# Altium PCB IO_Driver1616.PcbDoc
Units mil, origin at the board's own origin, x right, y up, seen from the top; angles counter-clockwise.
Board outline 7838.58 x 6988.19 mil, 2 copper layers (Top Layer, Bottom Layer); 104 components, 121 nets, 366 pads, 36 vias.
Unrouted connection lines stored in the file: 8.
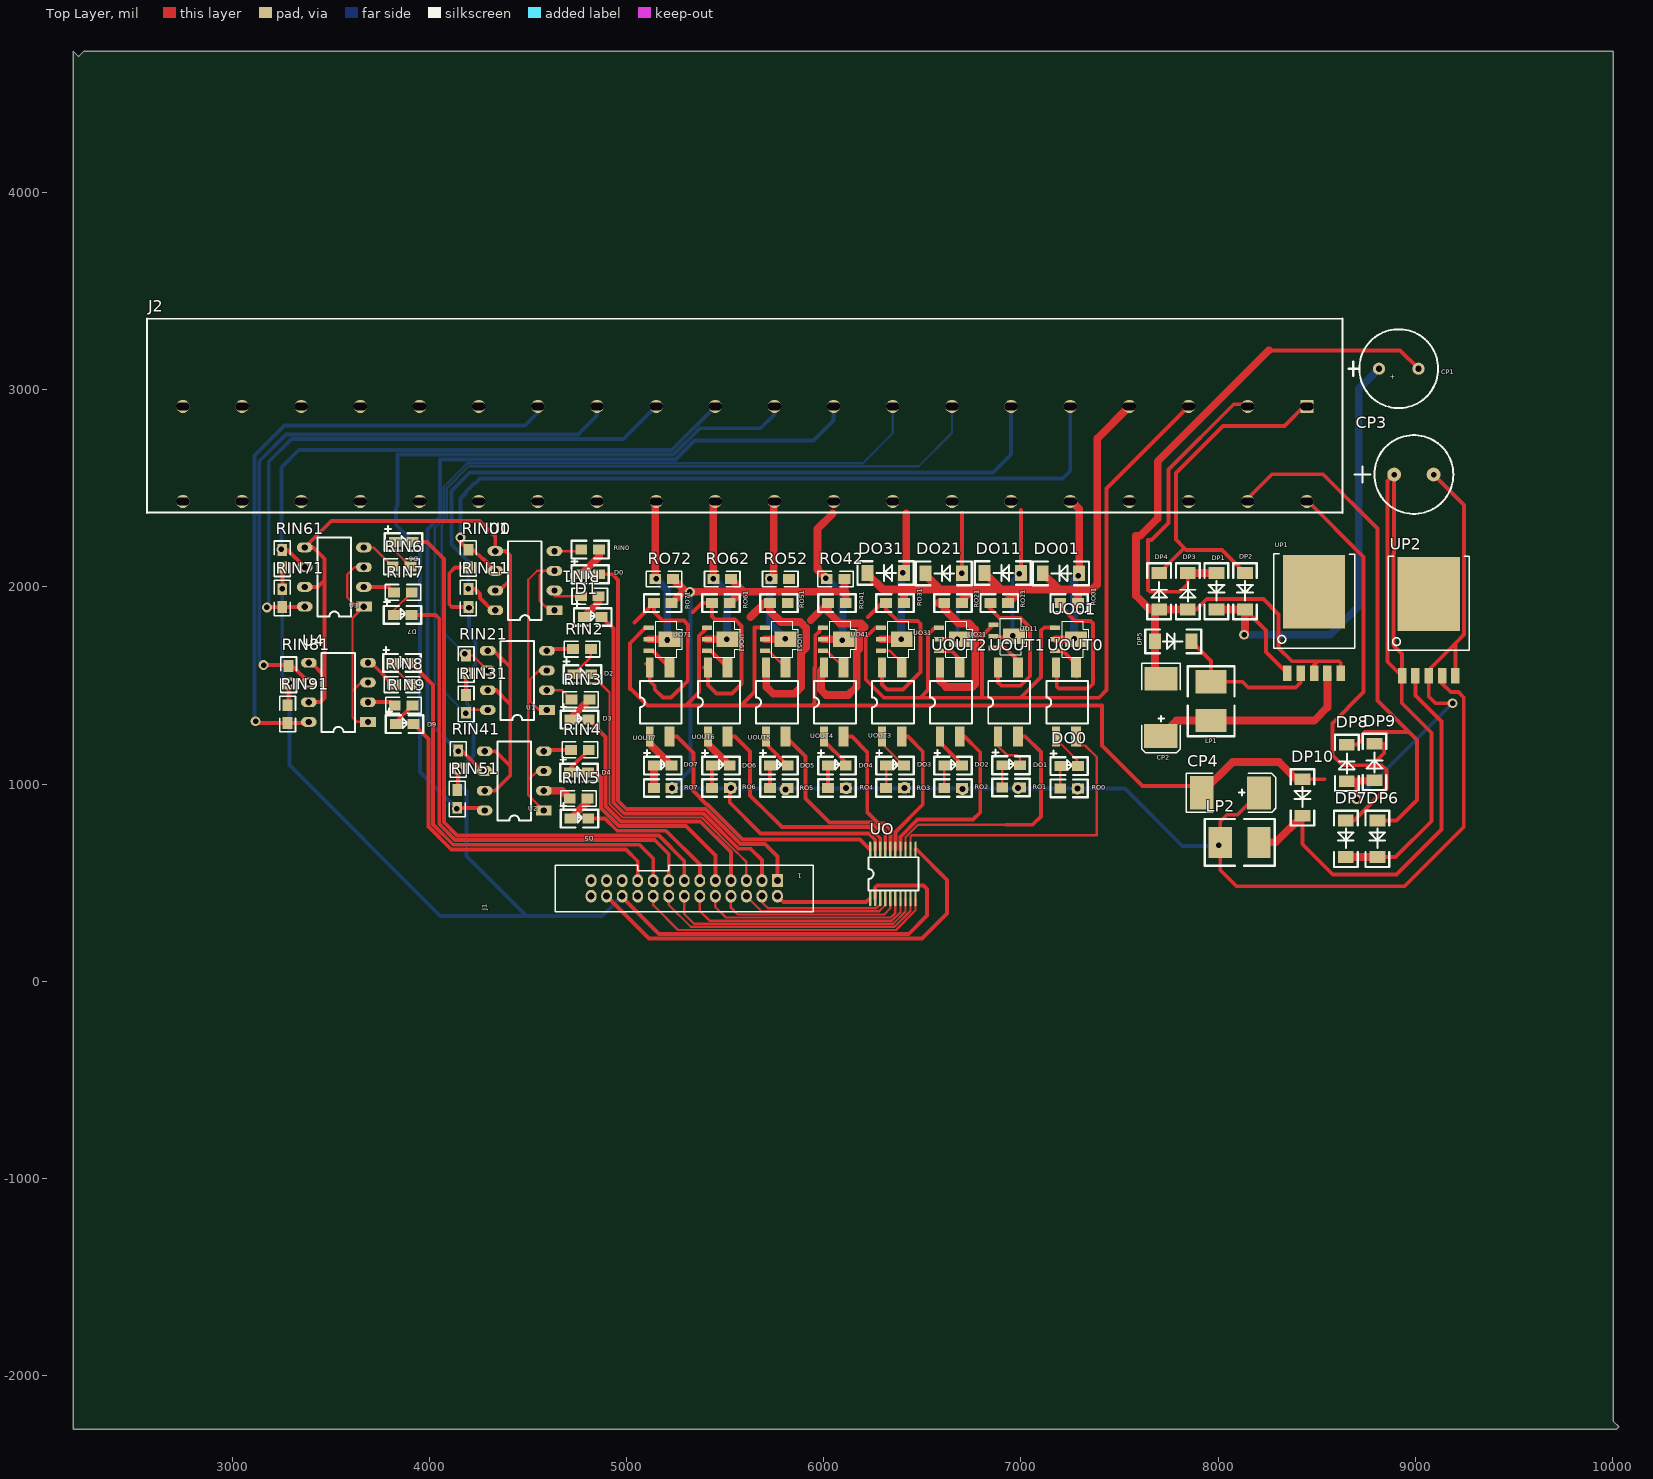
[diagram p0: Top Layer view]
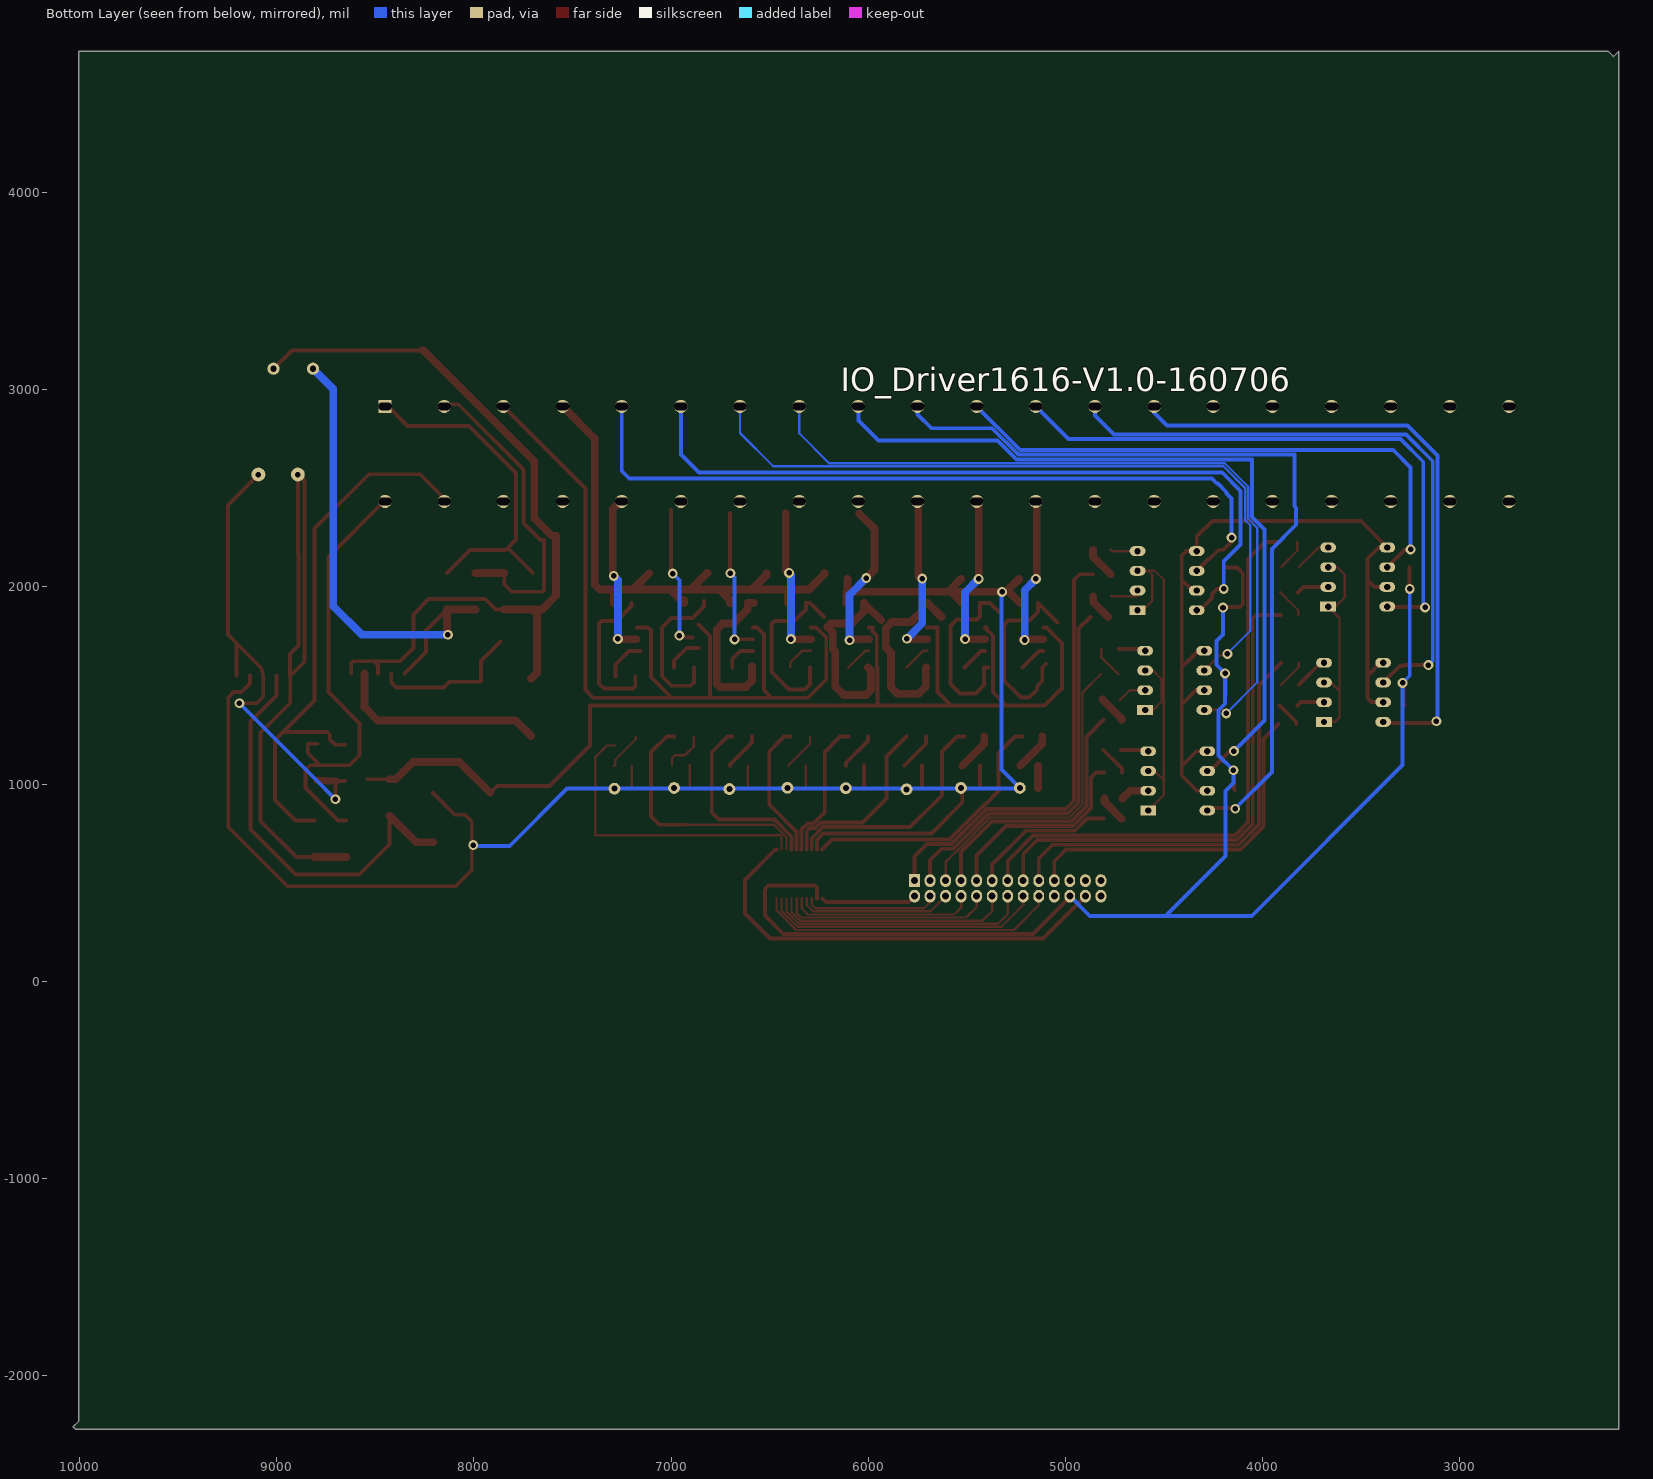
[diagram p1: Bottom Layer view, seen from below]

## Layer stack, top to bottom
Top Layer: signal copper 1.4
Dielectric: dielectric 12.6, FR-4, Dk 4.8
Bottom Layer: signal copper 1.4

## Board outline
2193.31,4716.54 2193.31,-2271.65 10020.08,-2271.65 10031.89,-2259.84 10004.33,-2232.28 10004.33,4716.54 2248.43,4716.54 2220.87,4688.98

## Design rules (kind name [scope] priority, off if disabled: settings)
Clearance [All] p1: gap=3.94
ComponentClearance [All] p1 off: gap=10 collisioncheckmode=3 verticalgap=10 showdistances=FALSE
HoleSize [All] p1: absolutevalues=TRUE maxlimit=393.7 minlimit=1 maxpercent=80.000 minpercent=20.000
HoleToHoleClearance [All] p1: gap=0 allowstackedmicrovias=TRUE
MinimumSolderMaskSliver [All] p1: minsoldermaskwidth=0
PlaneConnect [All] p1: planeconnectstyle=Relief reliefexpansion=11.81 reliefentries=4 reliefconductorwidth=15.75 reliefairgap=10
PolygonConnect [All] p1: connectstyle=Relief reliefconductorwidth=10 reliefentries=4 polygonreliefangle="90 Angle"
RoutingVias [All] p1: holewidth=28 width=50 viastyle="Through Hole" minholewidth=11.81 minwidth=23.62 maxholewidth=31.5 maxwidth=78.74
SilkToSilkClearance [All] p1: silktosilkclearance=0
SilkscreenOverComponentPads [All] p1: minsilkscreentomaskgap=0
SolderMaskExpansion [All] p1: expansion=4
TestPointUsage [All] p1: valid=0 allowmultiple=FALSE
Testpoint [All] p1: side=15 testpointundercomponent=TRUE minsize=40 maxsize=100 preferedsize=60 minholesize=0 maxholesize=40 preferedholesize=32 testpointgrid=1 style=1023 order=0123456789
Width [All] p1: maxlimit=39.37 minlimit=11.81 preferedwidth=19.68
17 further rules are at their usual default settings.

## Components (designator, comment, footprint, x,y, rotation, side; value= is the part's Value field where it differs from the comment)
CP1 "470u/50V" RB.2/.4#1 8815.51,3106.22 r180 top
CP2 "100u/25V" 7343 7709.41,1243.5 r270 top
CP3 "470u/50V" RB.2/.4#2 8992.24,2569.41 r180 top
CP4 "100u/25V" 7343 8207.24,954.41 r0 top
D0 "LED" LED-1 4770.39,2063.5 r0 top
D1 "LED" LED-1 4783.27,1847.24 r0 top
D2 "LED" LED-1 4731.02,1556.38 r0 top
D3 "LED" LED-1 4716.02,1326.38 r0 top
D4 "LED" LED-1 4713.5,1057.99 r0 top
D5 "LED" LED-1 4715.94,824.25 r0 top
D6 "LED" LED-1 3824.09,2227.52 r0 top
D7 "LED" LED-1 3819.09,1857.52 r0 top
D8 "LED" LED-1 3815.91,1614.21 r0 top
D9 "LED" LED-1 3829.33,1303.7 r0 top
DO0 "LED" LED-1 7199.39,1090.71 r0 top
DO01 "1N4007" sma 7295,2068.66 r180 top
DO1 "LED" LED-1 6904.98,1095.43 r0 top
DO2 "LED" LED-1 6610.57,1093.07 r0 top
DO3 "LED" LED-1 6316.16,1093.07 r0 top
DO4 "LED" LED-1 6021.75,1093.07 r0 top
DO5 "LED" LED-1 5727.35,1093.07 r0 top
DO6 "LED" LED-1 5432.93,1093.07 r0 top
DO7 "LED" LED-1 5138.52,1093.07 r0 top
DO11 "1N4007" sma 7000,2070 r180 top
DO21 "1N4007" sma 6700.58,2068.66 r180 top
DO31 "1N4007" sma 6406.16,2070 r180 top
DP1 "DIODE" 4007 7990.87,2070.12 r270 top
DP2 "DIODE" 4007 8135.87,2070.12 r270 top
DP3 "DIODE" 4007 7845.87,1885.12 r90 top
DP4 "DIODE" 4007 7700.87,1885.12 r90 top
DP5 "1N5819" sma 7679.41,1723.5 r0 top
DP6 "DIODE" 4007 8807.24,814.41 r270 top
DP7 "DIODE" 4007 8647.24,814.41 r270 top
DP8 "DIODE" 4007 8652.24,1014.41 r90 top
DP9 "DIODE" 4007 8792.24,1019.41 r90 top
DP10 "1N5819" sma 8427.24,1024.41 r270 top
J1 "HEADER 13X2" "IDC26 -2.0" 5765,510 r180 top
J2 "CON40" KF7.62-40p 2800,3880 r180 top
LP1 "33uH" L-5×5 7964.41,1518.5 r270 top
LP2 "33uH" L-5*5 8207.24,704.41 r180 top
RIN0 "3K" 0805 4770.39,2188.5 r0 top
RIN1 "3K" 0805 4768.27,1952.24 r0 top
RIN01 "3K" 0805 4197.4,2098.15 r90 top
RIN2 "3K" 0805 4728.94,1683.94 r0 top
RIN3 "3K" 0805 4721.26,1428.03 r0 top
RIN4 "3K" 0805 4718.03,1173.31 r0 top
RIN5 "3K" 0805 4711.38,926.5 r0 top
RIN6 "3K" 0805 3814.09,2102.52 r0 top
RIN7 "3K" 0805 3820.32,1971.93 r0 top
RIN8 "3K" 0805 3815.91,1504.21 r0 top
RIN9 "3K" 0805 3823.86,1399.02 r0 top
RIN11 "3K" 0805 4197.4,1898.15 r90 top
RIN21 "3K" 0805 4186.02,1561.38 r90 top
RIN31 "3K" 0805 4186.02,1451.38 r270 top
RIN41 "3K" 0805 4145.94,1079.25 r90 top
RIN51 "3K" 0805 4140.94,969.25 r270 top
RIN61 "3K" 0805 3254.09,2097.52 r90 top
RIN71 "3K" 0805 3254.09,1987.52 r270 top
RIN81 "3K" 0805 3285.91,1509.21 r90 top
RIN91 "3K" 0805 3280.91,1399.21 r270 top
RO0 "3K" 0805 7289.39,977.64 r180 top
RO1 "300Ω" 0805 6994.98,982.36 r180 top
RO01 "3K" 0805 7289.39,1917.32 r180 top
RO2 "300Ω" 0805 6700.57,980 r180 top
RO3 "300Ω" 0805 6406.16,980 r180 top
RO4 "300Ω" 0805 6111.75,980 r180 top
RO5 "300Ω" 0805 5817.35,980 r180 top
RO6 "300Ω" 0805 5522.93,980 r180 top
RO7 "300Ω" 0805 5228.52,980 r180 top
RO11 "3K" 0805 6934.62,1917.32 r180 top
RO21 "3K" 0805 6700.58,1917.32 r180 top
RO31 "3K" 0805 6406.16,1917.32 r180 top
RO41 "3K" 0805 6111.75,1917.32 r180 top
RO42 "3K" 0805 6105,2040 r180 top
RO51 "3K" 0805 5817.35,1917.32 r180 top
RO52 "3K" 0805 5824.35,2040 r180 top
RO61 "3K" 0805 5522.93,1917.32 r180 top
RO62 "3K" 0805 5529.93,2040 r180 top
RO71 "3K" 0805 5228.52,1917.32 r180 top
RO72 "3K" 0805 5235.52,2040 r180 top
U0 "TLP250" DIP8 4634.21,1881.1 r180 top
U1 "TLP250" DIP8 4595.75,1375.83 r180 top
U2 "TLP250" DIP8 4580.35,866.02 r180 top
U3 "TLP250" DIP8 3667.72,1899.53 r180 top
U4 "TLP250" DIP8 3688.54,1314.96 r180 top
UO "TXS0108E" TXS0108E 6235,420 r90 top
UO01 "BCX56" SOP-89 7173.39,1675.08 r270 top
UO11 "BCX56" SOP-89 6860,1690 r270 top
UO21 "BCX56" SOP-89 6584.58,1675.08 r270 top
UO31 "BCX56" SOP-89 6290.16,1675.08 r270 top
UO41 "BCX56" SOP-89 5995.75,1675.08 r270 top
UO51 "BCX56" SOP-89 5701.35,1675.08 r270 top
UO61 "BCX56" SOP-89 5406.93,1675.08 r270 top
UO71 "BCX56" SOP-89 5112.53,1675.08 r270 top
UOUT0 "OPTOISO1" SO4 7178.42,1240.67 r180 top
UOUT1 "OPTOISO1" SO4 6884.01,1240.67 r180 top
UOUT2 "OPTOISO1" SO4 6589.61,1240.67 r180 top
UOUT3 "OPTOISO1" SO4 6295.2,1240.67 r180 top
UOUT4 "OPTOISO1" SO4 6000.79,1240.67 r180 top
UOUT5 "OPTOISO1" SO4 5706.38,1240.67 r180 top
UOUT6 "OPTOISO1" SO4 5411.97,1240.67 r180 top
UOUT7 "OPTOISO1" SO4 5117.56,1240.67 r180 top
UP1 "LM2596-5" HRP5 8350.67,1561.06 r0 top
UP2 "LM2596-5" HRP5 8932.24,1549.41 r0 top

## Footprints (in the part's own frame and the unit in brackets; to place one, negate y for a bottom-side part, rotate by r counter-clockwise, add the part's x,y. Pads: shape width x height; smd on the part's side, far side on the other; paste and mask are expansions set on the pad)
0805 [mil]
  rect 60x50 smd: 1(0,0) 2(90,0)
  silkscreen extent -50,-45 140,45
4007 [mil]
  rect 60x80 smd: 1(0,0) 2(185,0)
  silkscreen extent -50,-60 235,60
7343 [mil]
  rect 120x169.29 smd: 1(0,0) 2(-290.61,0.72)
  silkscreen extent -370,-98 85,99
DIP8 [mil]
  rect 80x50 hole 32: 1(0,0)
  oval 80x50 hole 32: 2(0,-100) 3(0,-200) 4(0,-300) 5(300,-300) 6(300,-200) 7(300,-100) 8(300,0)
  silkscreen extent 65,-350 235,50
HRP5 [mm]
  rect 8x9.5 smd: 0(3.44,10.524)
  rect 1.1x2 smd: 1(0,0) 2(1.72,0) 3(3.44,0) 4(5.16,0) 5(6.88,0)
  silkscreen extent -1.78,3.25 8.69,15.39
"IDC26 -2.0" [mm]
  rect 1.397x1.651 hole 0.9: 1(0,0)
  oval 1.397x1.651 hole 0.9: 2(0,2) 3(2,0) 4(2,2) 5(4,0) 6(4,2) 7(6,0) 8(6,2) 9(8,0) 10(8,2) 11(10,0) 12(10,2) 13(12,0) 14(12,2) 15(14,0) 16(14,2) 17(16,0) 18(16,2) 19(18,0) 20(18,2) 21(20,0) 22(20,2) 23(22,0) 24(22,2) 25(24,0) 26(24,2)
  silkscreen extent -4.6,-2 28.6,4
KF7.62-40p [mm]
  rect 1.7x1.7 hole 1 slot 1.7 at 0 deg: 1(-143.51,24.511)
  round 1.7 hole 1 slot 1.7 at 0 deg: 2(-135.89,24.511) 3(-128.27,24.511) 4(-120.65,24.511) 5(-113.03,24.511) 6(-105.41,24.511) 7(-97.79,24.511) 8(-90.17,24.511) 9(-82.55,24.511) 10(-74.93,24.511) 11(-67.31,24.511) 12(-59.69,24.511) 13(-52.07,24.511) 14(-44.45,24.511) 15(-36.83,24.511) 16(-29.21,24.511) 17(-21.59,24.511) 18(-13.97,24.511) 19(-6.35,24.511) 20(1.27,24.511) 21(-143.51,36.751) 22(-135.89,36.751) 23(-128.27,36.751) 24(-120.65,36.751) 25(-113.03,36.751) 26(-105.41,36.751) 27(-97.79,36.751) 28(-90.17,36.751) 29(-82.55,36.751) 30(-74.93,36.751) 31(-67.31,36.751) 32(-59.69,36.751) 33(-52.07,36.751) 34(-44.45,36.751) 35(-36.83,36.751) 36(-29.21,36.751) 37(-21.59,36.751) 38(-13.97,36.751) 39(-6.35,36.751) 40(1.27,36.751)
  silkscreen extent -148.12,13.21 5.88,38.23
L-5*5 [mm]
  rect 3x4 smd: 1(0,0) 2(5,0)
  silkscreen extent -2,-3 7,3
L-5×5 [mm]
  rect 3x4 smd: 1(0,0) 2(5,0)
  silkscreen extent -2,-3 7,3
LED-1 [mil]
  rect 60x50 smd: 1(0,0) 2(90,0)
  silkscreen extent -50,-45 140,80
RB.2/.4#1 [mil]
  round 62 hole 32: 1(0,0) 2(-200,0)
  silkscreen extent -300,-200 155,200
RB.2/.4#2 [mil]
  round 70 hole 28: 1(100,0) 2(-100,0)
  silkscreen extent -200,-200 300,200
sma [mil]
  rect 60x80 smd: 1(0,0) 2(185,0)
  silkscreen extent -50,-60 235,60
SO4 [mil]
  rect 40x100 smd: 1(0,0) 4(0,-350.39)
  rect 50x100 smd: 2(-100,0) 3(-100,-350.39)
  silkscreen extent -162,-281 50,-66
SOP-89 [mm]
  rect 0.6x1.3 smd: 1(0,0) 2(-1.5,0) 3(-3,0)
  rect 2x2.8 smd: 2(-1.5,2.667)
  silkscreen extent -3.85,0.89 0.85,4.32
TXS0108E [mm]
  oval 2.032x0.3 smd: 1(0,0) 2(0,-0.65) 3(0,-1.3) 4(0,-1.95) 5(0,-2.6) 6(0,-3.25) 7(0,-3.9) 8(0,-4.55) 9(0,-5.2) 10(0,-5.85) 11(6.3,-5.85) 12(6.3,-5.2) 13(6.3,-4.55) 14(6.3,-3.9) 15(6.3,-3.25) 16(6.3,-2.6) 17(6.3,-1.95) 18(6.3,-1.3) 19(6.3,-0.65) 20(6.3,0)
  silkscreen extent 1,-6.2 5.3,0.2

## Part data
CP1 CP2 CP3 CP4: library part "CAPACITOR POL"
D5 D6 D7 D8 DO01 DO11 DO21 DO31: library part DIODE, "Diode"
DP1 DP2 DP3 DP4 DP6 DP7 DP8 DP9: "Diode"
DP5 DP10: library part ZENER2, "Zener Diode"
J1: library part "HEADER 17X2"
LP1 LP2: library part INDUCTOR
RIN0 RIN1 RIN01 RIN2 RIN3 RIN4 RIN5 RIN6 RIN7 RIN8 RIN9 RIN11 RIN21 RIN31 RIN41 RIN51 RIN61 RIN71 RIN81 RIN91 RO0 RO1 RO01 RO2 RO3 RO4 RO5 RO6 RO7 RO11 RO21 RO31 RO41 RO42 RO51 RO52 RO61 RO62 RO71 RO72: library part RES2
U0 U4 UOUT0 UOUT1 UOUT2 UOUT3 UOUT4 UOUT5 UOUT6 UOUT7: "Optoisolator"
U1 U2 U3: library part OPTOISO1, "Optoisolator"
UO11 UO21 UO31 UO41 UO51 UO61 UO71: library part BCX-56

## Free pads (board coordinates)
  round 60 hole 30: 0(5231.1,979.92) 1(5529.53,980.32) 2(5805.51,973.23) 3(6113.39,979.13) 4(6409.45,980.71) 5(6703.54,974.41) 6(6984.65,979.92) 7(7286.61,976.38)

## Via types
v1: diameter 50, hole 28, Top Layer to Bottom Layer, 36 vias

## Nets (pads, with @x,y where several pads share a name; then routed paths per layer and width w, separated by ;. In a path a pad name is that pad's centre, name@x,y a point inside that pad or via, vN(x,y) a via of type N, cw(c..) or ccw(c..) an arc to the next point about the centre after c; other vN are vias at no path point)
AC0: DP2.1 DP4.2 J2.1 | length 1755.9
  Top Layer w19.68: DP4.2 7827.83,2197.09 ; DP2.1 8018.58,2187.4 7837.52,2187.4 ; J2.1@8445.67,2925.79 8335.63,2815.75 8024.41,2815.75 7785.51,2576.85 7785.51,2239.41 7827.83,2197.09 ; 7827.83,2197.09 7837.52,2187.4 ; 7827.83,2197.09 7837.52,2187.4
AC1: DP1.1 DP3.2 J2.2 | length 1620.2
  Top Layer w19.68: DP3.2 7845.87,2015.16 7805.91,1975.2 7653.93,1975.2 7644.49,1984.64 7644.49,2238.18 7662.59,2238.18 7747.44,2323.03 7747.44,2594.29 8078.94,2925.79 J2.2@8145.67,2925.79
  Top Layer w39.37: DP3.2 DP1.1
AC2: DP7.1 DP9.2 J2.21 | length 2492.1
  Top Layer w19.68: J2.21@8445.67,2443.9 8737.4,2152.17 8737.4,1465.75 8579.13,1307.48 8579.13,1145.62 8629.48,1095.28 ; DP7.1 8688.98,814.41 8854.48,979.91 8854.48,1070.28 8829.48,1095.28 8779.48,1095.28 ; DP9.2 8841.98,1204.41 8841.98,1157.78 8779.48,1095.28 ; 8629.48,1095.28 8779.48,1095.28 ; 8629.48,1095.28 8779.48,1095.28
AC3: DP6.1 DP8.2 J2.22 | length 2948.3
  Top Layer w19.68: J2.22@8145.67,2443.9 8272.64,2570.87 8531.5,2570.87 8807.48,2294.88 8807.48,1423.62 8966.69,1264.41 ; DP8.2 8704.48,1199.41 8730.48,1225.41 8730.48,1251.91 8742.98,1264.41 8966.69,1264.41 ; DP6.1 8904.57,814.41 9008.27,918.11 9008.27,1222.84 ; 8966.69,1264.41 9008.27,1222.84 ; 8966.69,1264.41 9008.27,1222.84
D_GND: U0.5 U0.7 U1.5 U1.7 U2.5 U2.7 U3.5 U3.7 U4.5 U4.7 | length 4481.4
  Top Layer w19.68: U3.7 3432.6,1999.53 3466.54,2033.46 3466.54,2143.7 ; U4.7 3447.24,1414.96 3468.11,1435.83 3468.11,1548.03 ; U4.5 3401.18,1614.96 3468.11,1548.03 ; 3457.09,2153.15 3466.54,2143.7 ; 4181.06,2334.25 4164.57,2334.25 ; U1.7 4337.56,1475.83 4409.84,1403.54 ; U2.5@4307.6,1166.02 U2.5 4335.95,1166.02 4409.84,1092.13 ; U2.7@4317.2,966.02 U2.7 4332.56,966.02 4409.84,1043.31 4409.84,1092.13 ; U0.7 4355.91,1981.1 4409.84,2035.04 ; 4373.62,1626.77 4324.57,1675.83 U1.5 4327.72,1675.83 4409.84,1593.7 ; 3466.54,2143.7 3468.11,2142.13 3468.11,1548.03 ; 3466.54,2143.7 3410.71,2199.53 U3.5 3502.44,2334.25 4164.57,2334.25 ; 4164.57,2334.25 4254.33,2334.25 4334.21,2254.37 U0.5 4386.61,2181.1 4409.84,2157.87 4409.84,2035.04 ; 4409.84,1092.13 4409.84,1403.54 ; 4409.84,1403.54 4409.84,1593.7 ; 4409.84,1593.7 4409.84,2035.04
DIN+5V: CP2.1 LP1.2 UP1.4 | length 1077.1
  Top Layer w39.37: CP2.1 7787.56,1321.65 LP1.2 8487.01,1321.65 8553.82,1388.46 UP1.4
DIN_GND: CP1.2 CP2.2 DP3.1 DP4.1 DP5.1 UP1.3 UP1.5 | length 4259.1
  Top Layer w19.68: DP3.1 7889.69,1885.12 7941.98,1937.41 8229.48,1937.41 8306.48,1860.41 8306.48,1689.41 8373.48,1622.41 8505.22,1622.41 ; 8257.48,3199.21 8922.52,3199.21 CP1.2 ; UP1.3 8486.1,1603.29 8505.22,1622.41 ; UP1.5 8621.54,1614.41 8613.54,1622.41 ; 8505.22,1622.41 8613.54,1622.41 ; 8505.22,1622.41 8613.54,1622.41
  Top Layer w39.37: CP2.2 7679.41,1564.83 DP5.1 7679.41,1863.66 DP4.1 ; DP3.1 DP4.1 ; 8257.48,3199.21 8255.91,3199.21 7692.91,2636.22 7692.91,2346.85 7605.12,2259.05 7583.86,2259.05 7583.86,1954.72 7653.47,1885.12 DP4.1
DOUT+5V: CP4.1 LP2.2 pad.0 pad.1 pad.2 pad.3 pad.4 pad.5 pad.6 pad.7 RO0.1 RO1.1 RO2.1 RO3.1 RO4.1 RO5.1 RO6.1 RO7.1 RO41.1 RO42.1 RO61.1 RO62.1 RO71.1 RO72.1 UO.19 UP2.4 | length 8947.6
  Top Layer w19.68: RO6.1 5522.93,905.41 5679.13,749.21 6228.74,749.21 6260.59,717.36 UO.19 ; CP4.1 8097.24,844.41 ; UP2.4 9135.39,1509.99 9179.48,1465.91 9218.78,1465.91 9245.28,1439.41 9245.28,781.5 8945.27,481.5 8092.52,481.5 8010.39,563.62 LP2.2 8010.39,809.21 8045.59,844.41 ; 8045.59,844.41 8097.24,844.41 ; 8045.59,844.41 8097.24,844.41
  Top Layer w39.37: RO71.1 5286.79,1975.59 ; RO72.1 5286.79,1988.73 5286.79,1975.59 ; RO61.1 5581.2,1975.59 ; RO62.1 5594.34,1975.59 ; RO42.1 6105,1979.25 6108.66,1975.59 ; RO41.1 6111.75,1972.5 6108.66,1975.59 ; 5286.79,1975.59 5581.2,1975.59 ; 5581.2,1975.59 5594.34,1975.59 ; 5594.34,1975.59 6108.66,1975.59
  Bottom Layer w19.68: v1@5324.8,1975.59 5324.8,1073.62 pad.0 5234.65,976.38 6113.39,976.38 6703.54,976.38 pad.7 7527.17,976.38 7817.72,685.83 v1@8010.24,685.83
  other v1: 8002.76,690.55 5321.26,1974.02
DOUT_GND: CP3.2 CP4.2 DP8.1 DP9.1 DP10.1 UO41.3 UO51.3 UO61.3 UO71.3 UP2.3 UP2.5 | length 8769.9
  Top Layer w19.68: UO71.3 5096.73,1793.19 5017.32,1713.78 5017.32,1481.5 5021.99,1481.5 5105.12,1398.37 5300.79,1398.37 ; UO61.3 5399.88,1793.19 5399.88,1783.97 5367.56,1751.65 5367.56,1465.14 5300.79,1398.37 ; UO51.3 5649.49,1793.19 5649.49,1467.15 5580.71,1398.37 ; 5956.38,1676.46 5956.38,1690.94 ; UO41.3 5978.62,1793.19 5978.62,1773.89 5956.38,1751.65 5956.38,1690.94 ; CP4.2 7881.21,990.55 7616.14,990.55 7411.08,1195.61 7411.08,1398.37 5939.71,1398.37 ; DP10.1 8539.48,1024.41 ; DP8.1 8701.48,1014.41 v1(8701.48,922.41) ; CP3.2 9247.48,2414.17 9247.48,1758.41 ; v1(9188.48,1409.41) 9101.48,1409.41 9067.68,1443.21 UP2.3 9078.48,1589.41 9203.11,1714.04 ; UP2.5 9203.11,1714.04 ; 5300.79,1398.37 5580.71,1398.37 ; 5580.71,1398.37 5939.71,1398.37 ; 5939.71,1398.37 5951.97,1410.63 5951.97,1589.57 5956.38,1593.99 5956.38,1690.94 ; 9203.11,1714.04 9247.48,1758.41 ; 9203.11,1714.04 9247.48,1758.41
  Top Layer w39.37: CP4.2 8072.54,1111.02 8309.84,1111.02 8396.46,1024.41 DP10.1 ; 8701.48,1014.41 DP9.1
  Bottom Layer w19.68: v1(8701.48,922.41) 8803.48,1024.41 ; 8803.48,1024.41 v1(9188.48,1409.41) 8803.48,1024.41
GND: J1.24 UO.11 | length 2262.8
  Top Layer w19.68: J1.24 5113.5,216.61 6498.9,216.61 6625.59,343.31 6625.59,513.78 6471.34,668.03 UO.11
"I/O OUT_0": J1.2 UO.1 | length 487.6
  Top Layer w19.68: J1.2 5794.29,401.97 6215,401.97 UO.1@6233.03,420
"I/O OUT_1": J1.4 UO.3 | length 681.8
  Top Layer w11.81: J1.4 5686.26,400.75 5716.85,370.16 6267.11,370.16 6286.18,389.22 UO.3
"I/O OUT_2": J1.6 UO.4 | length 783.4
  Top Layer w11.81: J1.6 5684.37,354.41 6280.58,354.41 6311.77,385.6 UO.4
"I/O OUT_3": J1.8 UO.5 | length 944
  Top Layer w11.81: J1.8 5528.78,373.19 5563.31,338.66 6306.17,338.66 6337.36,369.85 UO.5
"I/O OUT_4": J1.10 UO.6 | length 1073
  Top Layer w11.81: J1.10 5450.04,376.73 5503.86,322.91 6339.34,322.91 6362.95,346.52 UO.6
"I/O OUT_5": J1.12 UO.7 | length 1200.4
  Top Layer w11.81: J1.12 5371.3,356.26 5420.39,307.16 6345.86,307.16 6388.54,349.84 UO.7
"I/O OUT_6": J1.14 UO.8 | length 1324.6
  Top Layer w11.81: J1.14 5292.56,341.3 5342.44,291.42 6352.39,291.42 6414.13,353.16 UO.8
"I/O OUT_7": J1.16 UO.9 | length 1413.3
  Top Layer w11.81: J1.16 5213.82,386.97 5325.12,275.67 6358.91,275.67 6439.72,356.48 UO.9
"I/O OUT_8": J1.18 UO.10 | length 1529.3
  Top Layer w11.81: J1.18 5135.08,385.96 5261.12,259.92 6365.43,259.92 6465.31,359.8 UO.10
"I/O OUT_9": J1.20
I/O_IN0: J2.5 RIN01.2 U0.6 | length 3943.9
  Top Layer w19.68: v1@4155.12,2252.36 4155.12,2230.43 RIN01.2 4222.48,2188.15 4270.47,2140.16 4275.16,2140.16 U0.6
  Bottom Layer w19.68: v1(4157.09,2249.21) 4157.09,2448.82 4182.18,2473.92 4182.18,2479.82 4226.48,2524.11 4232.38,2524.11 4257.48,2549.21 7211.81,2549.21 7250,2587.4 J2.5
I/O_IN1: J2.6 RIN11.2 U0.8 | length 3894.6
  Top Layer w19.68: RIN11.2 4231.93,1988.15 4256.69,1963.39 4256.69,1942.52 4318.11,1881.1 U0.8
  Bottom Layer w19.68: 4193.31,2133.86 4185.83,2141.34 ; v1(4196.85,1989.37) 4196.85,2130.31 4185.83,2141.34 ; J2.6 6950,2671.65 6857.48,2579.13 4204.33,2579.13 4111.81,2486.61 4111.81,2215.35 4185.83,2141.34
I/O_IN2: J2.7 RIN21.2 U1.6 | length 3853.6
  Top Layer w11.81: RIN21.2 4220.2,1651.38 U1.6
  Bottom Layer w11.81: v1(4178.74,1659.84) 4178.74,1660.24 4062.2,1776.77 4062.2,2312.09 4088.58,2338.47 4088.58,2500.96 4198.65,2611.02 6481.5,2611.02 6650,2779.53 J2.7
I/O_IN3: J2.8 RIN31.2 U1.8 | length 3875.2
  Top Layer w11.81: RIN31.2 4200.47,1375.83 U1.8
  Bottom Layer w11.81: v1(4184.25,1358.27) 4026.77,1515.75 4026.77,2298.93 4072.83,2345 4072.83,2507.48 4192.13,2626.77 6198.43,2626.77 6350,2778.35 J2.8
I/O_IN4: J2.9 RIN41.2 U2.6 | length 3903.2
  Top Layer w19.68: RIN41.2 4163.58,1169.25 4273.58,1059.25 U2.6
  Bottom Layer w19.68: v1(4145.67,1166.54) 3989.76,1322.44 3989.76,2289.76 4053.15,2353.15 4053.15,2646.46 5248.27,2646.46 5343.94,2742.13 5948.03,2742.13 6050,2844.09 J2.9
I/O_IN5: J2.10 RIN51.2 U2.8 | length 4108.8
  Top Layer w19.68: RIN51.2 4267.12,879.25 U2.8
  Bottom Layer w19.68: v1(4138.98,874.41) 3952.76,1060.63 3952.76,2192.13 3829.92,2314.96 3829.92,2399.61 3838.98,2408.66 3838.98,2670.08 5238.49,2670.08 5372.34,2803.94 5679.92,2803.94 5750,2874.02 J2.10
I/O_IN6: J2.11 RIN61.2 U3.6 | length 2895.2
  Top Layer w19.68: RIN61.2 3279.72,2187.52 U3.6
  Bottom Layer w19.68: v1(3249.21,2189.37) 3249.21,2605.51 3337.4,2693.7 5228.7,2693.7 J2.11
I/O_IN7: J2.12 RIN71.2 U3.8 | length 3017.5
  Top Layer w19.68: v1(3175.98,1895.28) 3178.23,1897.52 RIN71.2 3365.71,1897.52 U3.8
  Bottom Layer w19.68: v1(3175.98,1895.28) 3185.04,1904.33 3185.04,2634.25 3300,2749.21 4984.21,2749.21 J2.12
I/O_IN8: J2.13 RIN81.2 U4.6 | length 3163.5
  Top Layer w19.68: v1(3159.06,1602.76) 3282.36,1602.76 RIN81.2 3304.29,1599.21 U4.6
  Bottom Layer w19.68: v1(3159.06,1602.76) 3137.2,1624.61 3137.2,2636.81 3273.23,2772.83 4753.15,2772.83 4850,2869.68 J2.13
I/O_IN9: J2.14 RIN91.2 U4.8 | length 3193.3
  Top Layer w19.68: v1(3118.9,1318.11) 3127.8,1309.21 RIN91.2 3382.79,1309.21 U4.8
  Bottom Layer w19.68: v1(3118.9,1318.11) 3113.58,1323.43 3113.58,2666.73 3265.75,2818.9 4484.65,2818.9 ; 4491.34,2825.59 4484.65,2818.9 ; J2.14 4550,2884.25 4484.65,2818.9
I/O_IN10: J2.15
I/O_IN11: J2.16
IN_0: D0.2 J1.1 | length 2276.3
  Top Layer w19.68: D0.2 4928.23,2063.5 4956.3,2035.43 4956.3,914.96 4998.03,873.23 5399.71,873.23 5577.67,695.28 5702.36,695.28 5765,632.64 J1.1
IN_1: D1.2 J1.3 | length 1944.7
  Top Layer w19.68: D1.2 4932.68,1787.83 4932.68,905.18 4988.25,849.61 5389.93,849.61 5567.88,671.65 5628.35,671.65 5686.26,613.74 J1.3
IN_2: D2.2 J1.5 | length 1608
  Top Layer w11.81: D2.2 4912.99,1464.41 4912.99,897.02 4980.09,829.92 5381.78,829.92 5559.73,651.97 5560.63,651.97 5607.52,605.08 J1.5
IN_3: D3.2 J1.7 | length 1351.1
  Top Layer w19.68: D3.2 4893.31,1239.1 4893.31,888.87 4971.94,810.24 5373.62,810.24 5528.78,655.08 J1.7
IN_4: D4.2 J1.9 | length 1038.3
  Top Layer w19.68: D4.2 4844.37,1057.99 4869.69,1032.68 4869.69,879.08 4962.16,786.61 5301.18,786.61 5450.04,637.76 J1.9
IN_5: D5.2 J1.11 | length 743.8
  Top Layer w19.68: D5.2 4891.11,824.25 4952.37,762.99 5200.79,762.99 5371.3,592.48 J1.11
IN_6: D6.2 J1.13 | length 2931
  Top Layer w19.68: D6.2 3987.83,2227.52 4073.62,2141.73 4073.62,806.12 4140.38,739.37 5163.39,739.37 5292.56,610.2 J1.13
IN_7: D7.2 J1.15 | length 2584.7
  Top Layer w19.68: D7.2 4031.06,1857.52 4050,1838.58 4050,796.34 4130.59,715.75 5142.52,715.75 5213.82,644.45 J1.15 J1.15@5213.82,542.48
IN_8: D8.2 J1.17 | length 2167.1
  Top Layer w19.68: D8.2 4018.11,1502.01 4018.11,794.82 4120.81,692.13 5066.12,692.13 5135.08,623.17 J1.17
IN_9: D9.2 J1.19 | length 1783.1
  Top Layer w19.68: D9.2 3994.49,1228.54 3994.49,785.04 4111.02,668.5 4996.1,668.5 5056.34,608.27 J1.19
IN_COM+: J1.21 J2.24 U0.1 U0.3 U1.1 U1.3 U2.1 U2.3 U3.1 U3.3 U4.1 U4.3 | length 3114.5
  Top Layer w11.81: U3.3 3620.39,2099.53 3583.07,2062.2 3583.07,1946.06 3629.61,1899.53 U3.1 3609.84,1841.65 3609.84,1471.65 ; U4.1 3632.28,1314.96 3609.84,1337.4 3609.84,1471.65 ; U4.3 3653.15,1514.96 3609.84,1471.65 ; U2.1 4501.57,944.8 4501.57,1020.08 ; U2.3 4547.52,1066.02 4501.57,1020.08 ; U1.1 4555.28,1375.83 4511.42,1419.68 4511.42,1531.5 4555.75,1575.83 U1.3 ; U0.1 4607.09,1881.1 4559.45,1928.74 4559.45,2061.02 4579.53,2081.1 ; U0.3 4579.53,2081.1 ; 4501.57,1020.08 4501.57,2035.43 4547.24,2081.1 4579.53,2081.1
IN_GND: J2.23
NetCP1_1: CP1.1 DP1.2 DP2.2 UP1.1 | length 2576.6
  Top Layer w19.68: DP2.2 8242.13,1778.86 8242.13,1669.61 UP1.1
  Top Layer w39.37: DP1.2 DP2.2 8135.87,1757.44 v1@8137.8,1755.51
  Bottom Layer w39.37: v1(8131.1,1757.09) 8567.32,1757.09 8712.2,1901.97 8712.2,3002.91 CP1.1
NetCP3_1: CP3.1 DP6.2 DP7.2 UP2.1 | length 3413.1
  Top Layer w19.68: DP6.2 8899.33,629.41 9081.1,811.18 9081.1,1259.84 8930.71,1410.24 8930.71,1547.87 8858.66,1619.92 8858.66,2535.83 CP3.1 8892.24,2172.17 8888.48,2168.41 8888.48,1703.41 8932.24,1659.65 UP2.1
  Top Layer w39.37: DP7.2 DP6.2
NetD0_1: D0.1 RIN0.2 | length 162.3
  Top Layer w39.37: D0.1 4860.39,2153.5 RIN0.2
NetD1_1: D1.1 RIN1.2 | length 136.1
  Top Layer w39.37: D1.1 4858.27,1922.24 RIN1.2
NetD2_1: D2.1 RIN2.2 | length 164
  Top Layer w11.81: D2.1 4818.94,1644.29 RIN2.2
NetD3_1: D3.1 RIN3.2 | length 141.1
  Top Layer w39.37: D3.1 4716.02,1332.8 RIN3.2
NetD4_1: D4.1 RIN4.2 | length 154.5
  Top Layer w19.68: D4.1 4713.5,1078.78 RIN4.2
NetD5_1: D5.1 RIN5.2 | length 137.6
  Top Layer w39.37: D5.1 4801.38,909.68 RIN5.2
NetD6_1: D6.1 RIN6.2 | length 158.1
  Top Layer w11.81: D6.1 3824.1,2182.52 RIN6.2
NetD7_1: D7.1 RIN7.2 | length 152.2
  Top Layer w11.81: D7.1 3819.1,1880.71 RIN7.2
NetD8_1: D8.1 RIN8.2 | length 147.3
  Top Layer w11.81: D8.1 3815.91,1594.21 RIN8.2
NetD9_1: D9.1 RIN9.2 | length 130.3
  Top Layer w19.68: D9.1 3829.33,1314.49 RIN9.2
NetDO0_1: DO0.1 RO0.2 | length 113.1
  Top Layer w11.81: RO0.2 DO0.1
NetDO0_2: DO0.2 UOUT0.1 | length 195.9
  Top Layer w11.81: UOUT0.1 7178.42,1227.09 7282.68,1122.83 7282.68,1097.43 DO0.2
NetDO1_1: DO1.1 RO1.2 | length 113.1
  Top Layer w11.81: RO1.2 DO1.1
NetDO1_2: DO1.2 UOUT1.1 | length 220.3
  Top Layer w11.81: UOUT1.1 6884.01,1191.58 6929.13,1146.46 6978.74,1146.46 6994.98,1130.21 DO1.2
NetDO2_1: DO2.1 RO2.2 | length 113.1
  Top Layer w11.81: RO2.2 DO2.1
NetDO2_2: DO2.2 UOUT2.1 | length 193.6
  Top Layer w19.68: UOUT2.1 6589.6,1210 6700.57,1099.03 DO2.2
NetDO3_1: DO3.1 RO3.2 | length 113.1
  Top Layer w11.81: RO3.2 DO3.1
NetDO3_2: DO3.2 UOUT3.1 | length 193.6
  Top Layer w11.81: UOUT3.1 6295.19,1204.04 DO3.2
NetDO4_1: DO4.1 RO4.2 | length 113.1
  Top Layer w19.68: RO4.2 DO4.1
NetDO4_2: DO4.2 UOUT4.1 | length 193.6
  Top Layer w19.68: UOUT4.1 6000.79,1218.9 6111.75,1107.93 DO4.2
NetDO5_1: DO5.1 RO5.2 | length 113.1
  Top Layer w19.68: RO5.2 DO5.1
NetDO5_2: DO5.2 UOUT5.1 | length 193.6
  Top Layer w19.68: UOUT5.1 5706.38,1204.04 DO5.2
NetDO6_1: DO6.1 RO6.2 | length 113.1
  Top Layer w19.68: RO6.2 DO6.1
NetDO6_2: DO6.2 UOUT6.1 | length 193.6
  Top Layer w39.37: UOUT6.1 5411.97,1204.04 DO6.2
NetDO7_1: DO7.1 RO7.2 | length 113.1
  Top Layer w39.37: RO7.2 DO7.1
NetDO7_2: DO7.2 UOUT7.1 | length 193.6
  Top Layer w39.37: UOUT7.1 5117.56,1204.04 DO7.2
NetDP5_2: DP5.2 LP1.1 UP1.2 | length 769.5
  Top Layer w19.68: DP5.2 7964.41,1623.5 LP1.1 8123.62,1518.5 8152.72,1489.41 8393.39,1489.41 8418.39,1514.41 UP1.2
NetDP10_2: DP10.2 LP2.1 UP2.2 | length 2118.5
  Top Layer w19.68: DP10.2 8427.24,694.8 8580.71,541.34 8904.33,541.34 9132.28,769.29 9132.28,1317.32 8999.96,1449.65 UP2.2
  Top Layer w39.37: LP2.1 8292.24,704.41 DP10.2
NetRIN0_1: RIN0.1 U0.4 | length 139.2
  Top Layer w11.81: U0.4 4762.99,2181.1 RIN0.1
NetRIN1_1: RIN1.1 U0.2 | length 162.9
  Top Layer w11.81: U0.2 4634.21,1952.24 RIN1.1
NetRIN2_1: RIN2.1 U1.4 | length 136.5
  Top Layer w19.68: U1.4 4603.86,1683.94 RIN2.1
NetRIN3_1: RIN3.1 U1.2 | length 145.3
  Top Layer w11.81: U1.2 4673.46,1475.83 RIN3.1
NetRIN4_1: RIN4.1 U2.4 | length 140.7
  Top Layer w19.68: U2.4 4587.64,1173.31 RIN4.1
NetRIN5_1: RIN5.1 U2.2 | length 147.4
  Top Layer w39.37: U2.2 4671.85,966.02 RIN5.1
NetRIN6_1: RIN6.1 U3.4 | length 186.6
  Top Layer w11.81: U3.4 3717.09,2199.53 RIN6.1
NetRIN7_1: RIN7.1 U3.2 | length 164
  Top Layer w19.68: U3.2 3792.71,1999.53 RIN7.1
NetRIN8_1: RIN8.1 U4.4 | length 173.2
  Top Layer w19.68: U4.4 3705.16,1614.96 RIN8.1
NetRIN9_1: RIN9.1 U4.2 | length 141.9
  Top Layer w19.68: U4.2 3807.91,1414.96 RIN9.1
NetRO01_2: RO01.2 UOUT0.4 | length 770.7
  Top Layer w19.68: UOUT0.4@7181.57,1545.91 7181.57,1495.2 7192.91,1483.86 7339.76,1483.86 7364.57,1508.66 7364.57,1813.38 7351.57,1826.38 7274.8,1826.38 7199.39,1901.79 RO01.2
NetRO11_2: RO11.2 UOUT1.4 | length 798.7
  Top Layer w19.68: RO11.2@6832.24,1929.41 6832.24,1900.65 6891.55,1841.34 6998.46,1841.34 7046.06,1793.74 7046.06,1546.68 6997.92,1498.54 6900.68,1498.54 6884.01,1515.2 UOUT1.4
NetRO21_2: RO21.2 UOUT2.4 | length 809.7
  Top Layer w39.37: 6580.32,1917.32 RO21.2 6610.57,1887.85 6684.65,1813.78 6737.82,1813.78 6768.5,1783.1 6768.5,1506.69 6754.33,1492.52 6620.08,1492.52 6589.6,1522.99 UOUT2.4 UOUT2.4@6589.6,1597.8
NetRO31_2: RO31.2 UOUT3.4 | length 931.9
  Top Layer w19.68: 6224.41,1846.85 6294.88,1917.32 RO31.2 6316.16,1885.81 6375.2,1826.77 6476.38,1826.77 6491.34,1811.81 6491.34,1568.11 6402.36,1479.13 6320.87,1479.13 6295.19,1504.81 UOUT3.4
NetRO41_2: RO41.2 UOUT4.4 | length 1033.9
  Top Layer w39.37: 5934.35,1829.92 RO41.2 6021.75,1873.13 6080.32,1814.57 6189.76,1814.57 6207.48,1796.85 6179.49,1768.86 6179.49,1684.98 6166.93,1672.41 6166.93,1494.09 6124.8,1451.97 6011.42,1451.97 5985.43,1477.95 5985.43,1575.71 UOUT4.4
NetRO51_2: RO51.2 UOUT5.4 | length 1003.1
  Top Layer w39.37: 5628.35,1846.85 5698.82,1917.32 RO51.2 5727.35,1876.59 5782.68,1821.26 5880.32,1821.26 5911.02,1790.55 5911.02,1692.52 5884.25,1665.75 5884.25,1490.16 5851.57,1457.48 5743.31,1457.48 5708.27,1492.52 5708.27,1589.17 UOUT5.4
NetRO61_2: RO61.2 UOUT6.4 | length 969.4
  Top Layer w19.68: 5337.01,1872.44 5381.89,1917.32 RO61.2 5432.93,1848.96 5448.03,1833.86 5550.79,1833.86 5583.07,1801.57 5583.07,1507.09 5534.25,1458.27 5456.69,1458.27 5411.97,1502.99 5411.97,1581.46 UOUT6.4@5402.36,1591.06 ; 5391.61,1591.06 UOUT6.4@5402.36,1591.06 ; UOUT6.4 UOUT6.4@5402.36,1591.06
NetRO71_2: RO71.2 UOUT7.4 | length 1036.2
  Top Layer w19.68: 5040.94,1819.74 RO71.2 5138.52,1872.5 5182.28,1828.74 5290.55,1828.74 5312.2,1807.09 5312.2,1720.47 5310.24,1718.5 5310.24,1523.23 5225.59,1438.58 5183.86,1438.58 5142.52,1479.92 5142.52,1498.03 5117.56,1522.99 UOUT7.4 UOUT7.4@5098.78,1609.84
NetUO01_1: UO01.1 UOUT0.3 | length 214.2
  Top Layer w19.68: UO01.1@7154.84,1674.02 7212.2,1674.02 7281.57,1604.65 UOUT0.3@7281.57,1545.91
NetUO11_1: UO11.1 UOUT1.3 | length 185.6
  Top Layer w19.68: UO11.1 6920.24,1690 6984.01,1626.22 UOUT1.3
NetUO21_1: UO21.1 UOUT2.3 | length 165.2
  Top Layer w19.68: UO21.1 6648.94,1675.08 6689.6,1634.41 UOUT2.3
NetUO31_1: UO31.1 UOUT3.3 | length 154.3
  Top Layer w11.81: UO31.1 6335.95,1675.08 6395.19,1615.83 UOUT3.3
NetUO41_1: UO41.1 UOUT4.3 | length 139.8
  Top Layer w11.81: UO41.1 6016.77,1675.08 UOUT4.3
NetUO51_1: UO51.1 UOUT5.3 | length 139.8
  Top Layer w11.81: UO51.1 5722.36,1675.08 UOUT5.3
NetUO61_1: UO61.1 UOUT6.3 | length 139.8
  Top Layer w19.68: UO61.1 5427.95,1675.08 UOUT6.3
NetUO71_1: UO71.1 UOUT7.3 | length 139.8
  Top Layer w19.68: UO71.1 5133.54,1675.08 UOUT7.3
OUT0: DO01.1 J2.25 UO01.2 | length 828.8
  Top Layer w39.37: UO01.2@7173.39,1734.13 UO01.2@7278.39,1734.13 ; J2.25@7245.67,2443.9 7295,2394.57 DO01.1
  Bottom Layer w39.37: v1(7269.29,1736.22) 7269.29,2034.25 v1(7290.55,2055.51)
OUT1: DO11.1 J2.26 UO11.2 | length 682.1
  Top Layer w19.68: 6889.48,1743.54 UO11.2@6923.62,1743.54 ; DO11.1 7000,2389.57
  Bottom Layer w19.68: v1(6957.48,1752.36) 6957.48,2033.46 v1(6990.94,2066.93)
OUT2: DO21.1 J2.27 UO21.2 | length 755.6
  Top Layer w19.68: UO21.2@6584.57,1734.13 UO21.2@6689.57,1734.13 ; DO21.1 6700.57,2375.02
  Bottom Layer w19.68: v1(6677.95,1733.46) 6677.95,2047.64 v1(6699.21,2068.9)
OUT3: DO31.1 J2.28 UO31.2 | length 751.2
  Top Layer w39.37: UO31.2@6290.16,1734.13 UO31.2@6395.16,1734.13 ; DO31.1 6418.31,2082.14 6418.31,2371.26
  Bottom Layer w39.37: v1(6391.73,1735.04) 6391.73,2061.02 v1(6401.57,2070.87)
OUT4: J2.29 RO42.2 UO41.2 | length 838.6
  Top Layer w39.37: UO41.2@5995.75,1734.13 UO41.2@6100.75,1734.13 ; RO42.2 5968.13,2086.87 5968.13,2293.72 6045.67,2371.26
  Bottom Layer w39.37: v1(6009.84,2044.49) 6094.49,1959.84 v1(6094.49,1728.74)
OUT5: J2.30 RO52.2 UO51.2 | length 850.2
  Top Layer w39.37: UO51.2@5701.35,1734.13 UO51.2@5806.35,1734.13 ; RO52.2 5745.67,2051.33 J2.30@5745.67,2443.9
  Bottom Layer w39.37: v1(5725.59,2041.34) 5725.59,1814.96 v1(5803.54,1737.01)
OUT6: J2.31 RO62.2 UO61.2 | length 836.1
  Top Layer w39.37: UO61.2@5406.93,1734.13 UO61.2@5511.93,1734.13 ; RO62.2 J2.31@5439.93,2438.16
  Bottom Layer w39.37: v1(5440.55,2039.76) 5508.66,1971.65 v1(5508.66,1735.04)
OUT7: J2.32 RO72.2 UO71.2 | length 842
  Top Layer w39.37: UO71.2@5112.52,1734.13 UO71.2@5217.52,1734.13 ; RO72.2 J2.32@5145.52,2443.75
  Bottom Layer w39.37: v1(5149.21,2039.76) 5206.69,1982.28 v1(5206.69,1730.32)
OUT8: J2.33
OUT9: J2.34
OUT_0: UO.12 UOUT0.2 | length 1535.2
  Top Layer w11.81: UO.12 6439.72,733.42 6446.85,740.55 7383.86,740.55 7383.86,1136.61 7324.96,1195.51 UOUT0.2@7281.57,1195.51
OUT_1: UO.13 UOUT1.2 | length 1267.9
  Top Layer w11.81: UO.13 6414.13,730.11 6477.73,793.7 6922.44,793.7
  Top Layer w19.68: 6922.44,793.7 7059.06,793.7 7100.79,835.43 7100.79,1161.42 7021.54,1240.67 UOUT1.2
OUT_2: UO.14 UOUT2.2 | length 962.3
  Top Layer w19.68: UO.14 6388.54,732.35 6475.48,819.29 6608.84,819.29 6757.09,819.29 6793.31,855.51 6793.31,1161.02 6713.66,1240.67 UOUT2.2
OUT_3: UO.15 UOUT3.2 | length 693.1
  Top Layer w19.68: UO.15 6362.95,757.05 6501.97,896.06 6501.97,1165.75 6427.05,1240.67 UOUT3.2
OUT_4: UO.16 UOUT4.2 | length 711.2
  Top Layer w19.68: UOUT4.2 6142.4,1240.67 6220.08,1162.99 6220.08,858.09 6278.19,799.98 6305.75,799.98 6337.36,768.37 UO.16
OUT_5: UO.17 UOUT5.2 | length 921.4
  Top Layer w19.68: UOUT5.2 5907.28,1139.76 5907.28,926.97 6029.53,804.72 6240.04,804.72 6268.41,776.36 6295.96,776.36 6311.77,760.55 UO.17
OUT_6: UO.18 UOUT6.2 | length 1173.2
  Top Layer w19.68: UOUT6.2 5549.09,1240.67 5625.59,1164.17 5625.59,942.52 5728.35,839.76 ; 5729.86,839.76 5788.52,781.1 6230.26,781.1 6286.18,725.18 UO.18
OUT_7: UO.20 UOUT7.2 | length 1367.9
  Top Layer w19.68: UOUT7.2 5255.39,1240.67 5338.98,1157.09 5338.98,963.78 5405.91,896.85 5409.5,896.85 5587.45,718.9 6184.13,718.9 UO.20
OUT_COM+: DO01.2 DO11.2 DO21.2 DO31.2 J2.4 RO01.1 RO11.1 RO21.1 RO31.1 | length 2872.8
  Top Layer w39.37: DO31.2 6221.16,2065.45 6300.39,1986.22 6422.44,1986.22 ; RO31.1 6406.16,1969.94 6422.44,1986.22 ; DO21.2 6515.57,2059.62 6588.98,1986.22 ; RO21.1 6700.57,1933.25 6753.54,1986.22 ; DO11.2 6816.65,2070 6900.43,1986.22 ; RO11.1@6934.62,1933.83 RO11.1 6959.94,1942.65 6990.73,1973.43 ; DO01.2 7192.44,1986.22 ; RO01.1 7289.39,1967.1 7270.27,1986.22 ; J2.4 7386.61,2751.61 7386.61,2012.2 7360.63,1986.22 7270.27,1986.22 ; 6422.44,1986.22 6588.98,1986.22 ; 6588.98,1986.22 6753.54,1986.22 ; 6753.54,1986.22 6900.43,1986.22 ; 6900.43,1986.22 7192.44,1986.22 ; 7192.44,1986.22 7270.27,1986.22
OUT_GND: J2.3 UO01.3 UO11.3 UO21.3 UO31.3 | length 4460.1
  Top Layer w19.68: UO31.3 6263.66,1793.19 6212.96,1742.49 6212.96,1529.17 6304.53,1437.6 6490.16,1437.6 ; UO21.3 6563.66,1793.19 6528.74,1758.27 6528.74,1476.18 6490.16,1437.6 ; UO11.3 6801.97,1750.08 6801.97,1439.27 6800.29,1437.6 ; UO01.3 7117.99,1793.19 7102.36,1777.56 7102.36,1542.02 6997.94,1437.6 ; J2.3 7433.86,2498.86 7433.86,1476.77 7394.68,1437.6 6997.94,1437.6 ; 6490.16,1437.6 6800.29,1437.6 ; 6800.29,1437.6 6997.94,1437.6
VCC+3.3V: J1.22 RIN01.1 RIN11.1 RIN21.1 RIN31.1 RIN41.1 RIN51.1 RIN61.1 RIN71.1 RIN81.1 RIN91.1 UO.2 | length 7681.2
  Top Layer w19.68: RIN71.1 RIN61.1 ; RIN91.1 3285.91,1404.21 RIN81.1 ; RIN51.1 4145.95,974.25 RIN41.1 ; RIN31.1 RIN21.1 ; RIN11.1 4114.45,1898.15 4100.79,1911.81 4100.79,2068.9 4130.04,2098.15 RIN01.1 ; J1.22 4977.6,426.34 5163.7,240.24 6430.79,240.24 6523.62,333.07 6523.62,466.92 6504.71,485.83 6271.57,485.83 6260.59,474.84 UO.2
  Bottom Layer w19.68: v1(3253.94,1989.37) 3253.94,1548.82 v1(3289.76,1512.99) 3289.76,1095.67 4055.12,330.32 4492.91,330.32 ; v1(4200.79,1894.49) 4200.79,1758.66 4233.86,1725.59 4233.86,1604.72 v1(4190.16,1561.02) 4190.16,1407.2 4223.03,1374.33 4223.03,1144.68 v1(4148.43,1070.08) 4148.43,1005.91 4188.98,965.35 4188.98,634.25 4492.91,330.32 ; J1.22 4876.65,330.32 4492.91,330.32
pads on no net: J1.23 J1.25 J1.26 J2.17 J2.18 J2.19 J2.20 J2.35 J2.36 J2.37 J2.38 J2.39 J2.40 RO51.1 RO52.1 UP1.0 UP2.0

## Silkscreen, mask and mechanical layers (free items; w line width, h text height)
Bottom Overlay:
  text "IO_Driver1616-V1.0-160706" at 6139.76,2992.13 h118.11
Mechanical 1:
  circle w10: c2385.04,362.2 r68.9
  circle w10: c2385.43,3275.59 r68.9
  circle w10: c9274.8,3275.59 r68.9
  circle w10: c9274.8,362.2 r68.9
  lines w10: 2247.24,224.41 2247.24,3413.39 9412.6,3413.39 9412.6,224.41 2247.24,224.41

## Text inside footprints (layer, text, board x,y; h text height)
CP1: Top Overlay "+" at 8899.13,3076.14 h23.62 r180
J1: Top Overlay "1" at 5887.05,545.43 h23.62 r180